# Altium PCB DistribValveBrd.PcbDoc
Units mm, origin at the board's own origin, x right, y up, seen from the top; angles counter-clockwise.
Board outline 60 x 32 mm, 2 copper layers (Top Layer, Bottom Layer); 13 components, 7 nets, 28 pads, 0 vias.
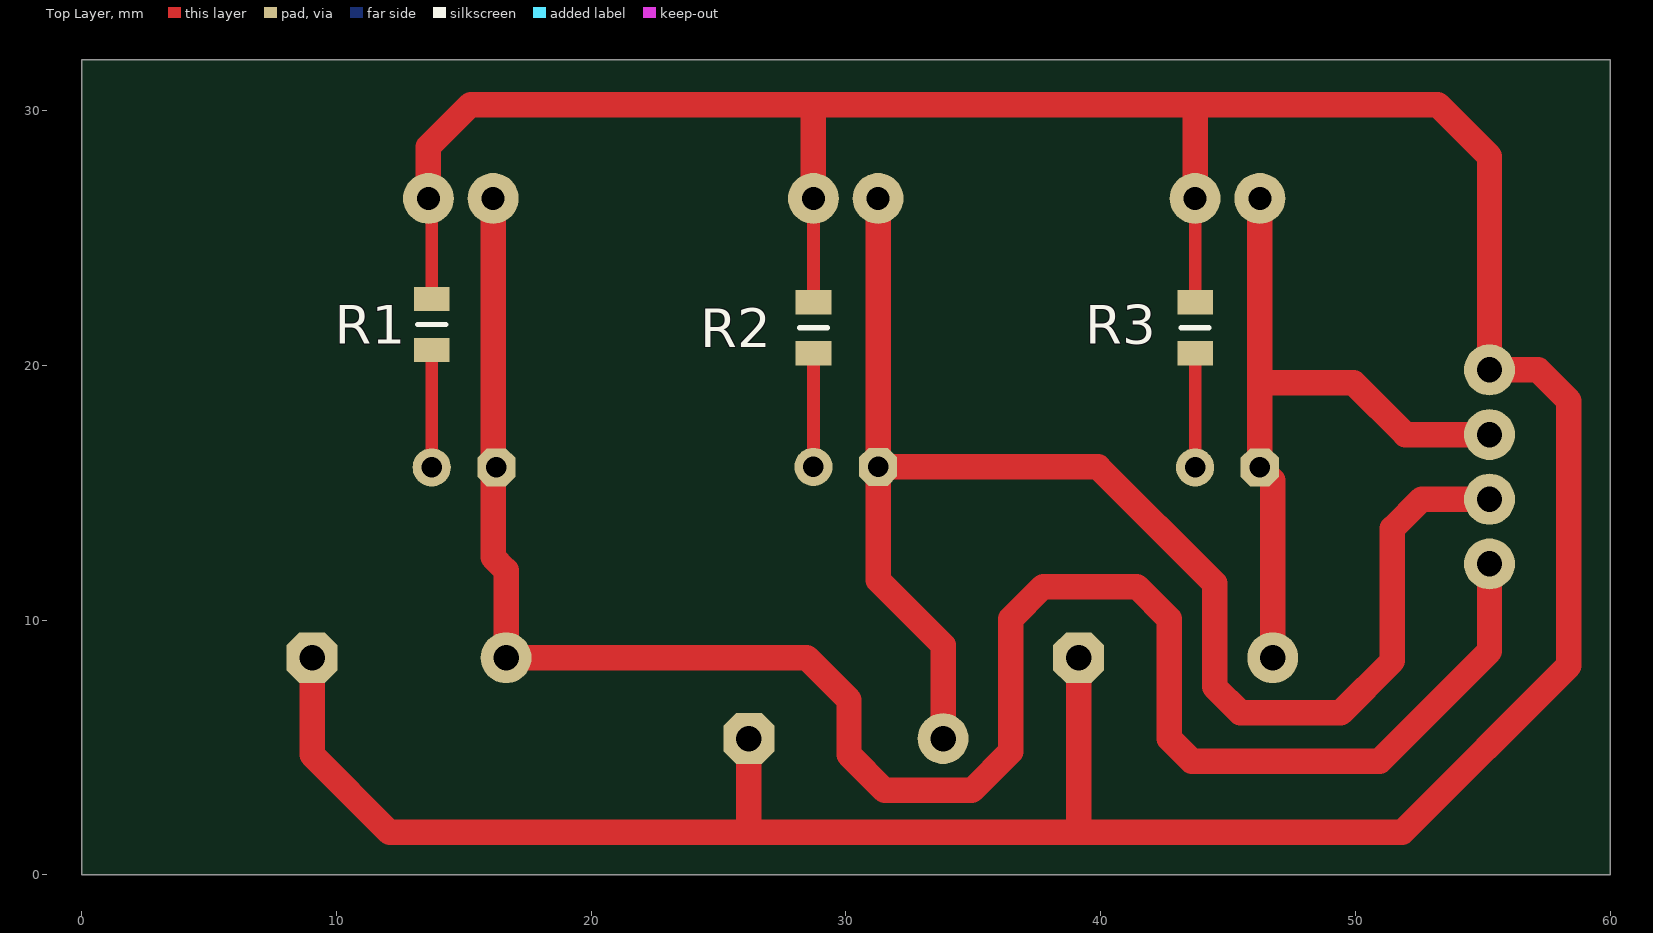
[diagram p0: Top Layer view]
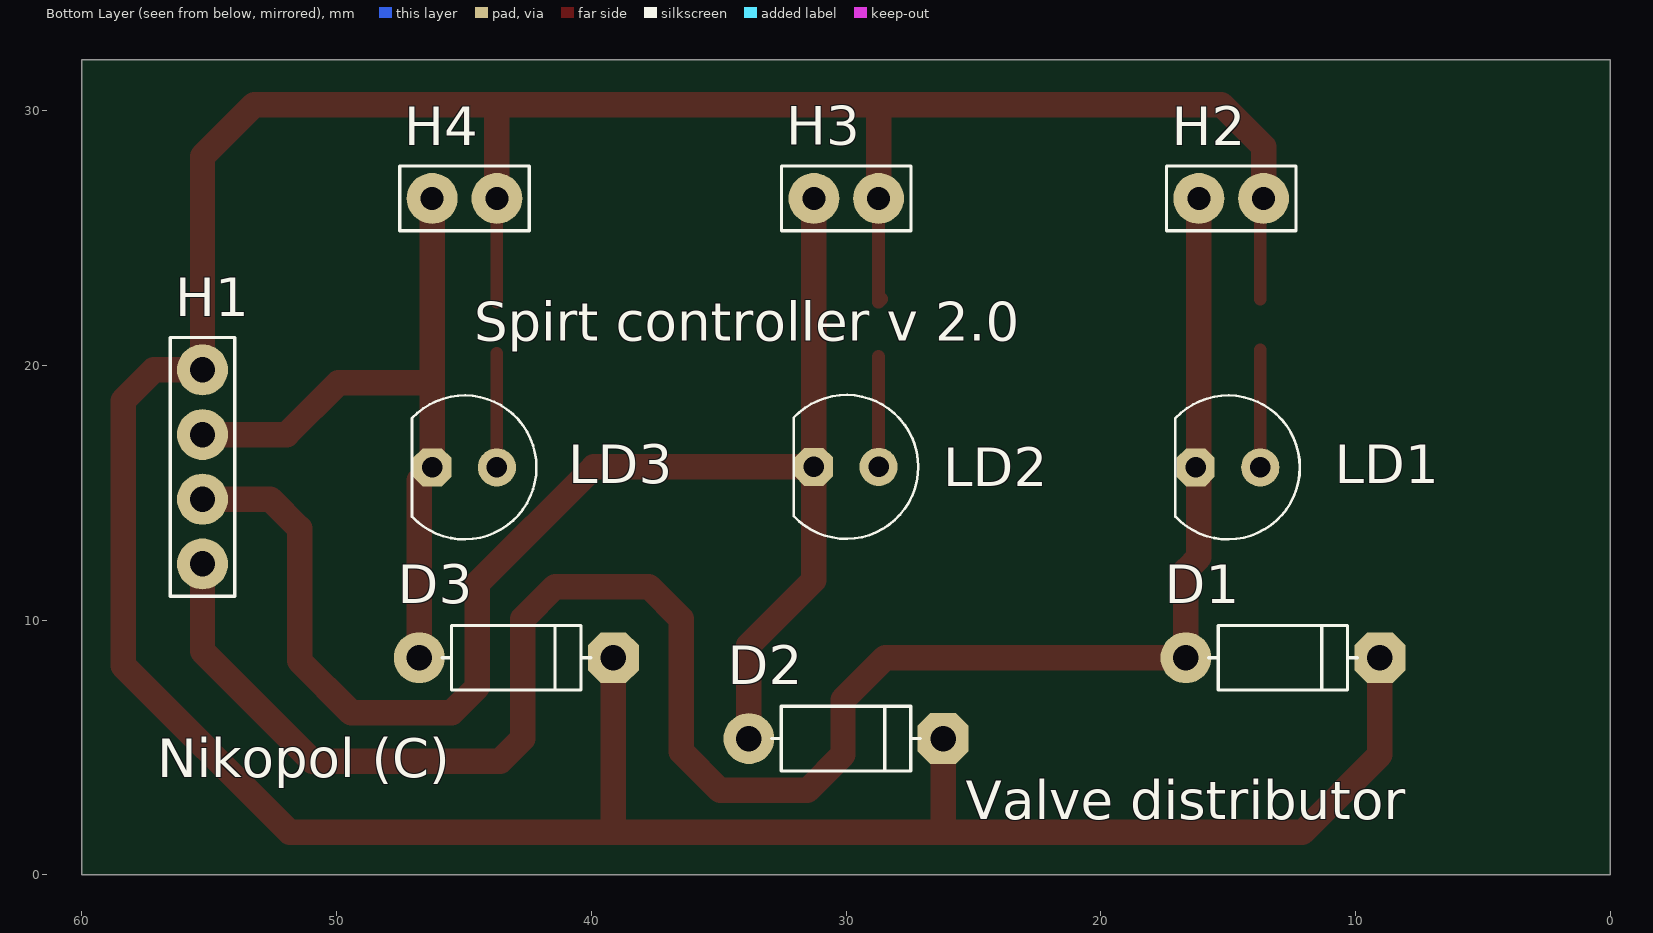
[diagram p1: Bottom Layer view, seen from below]
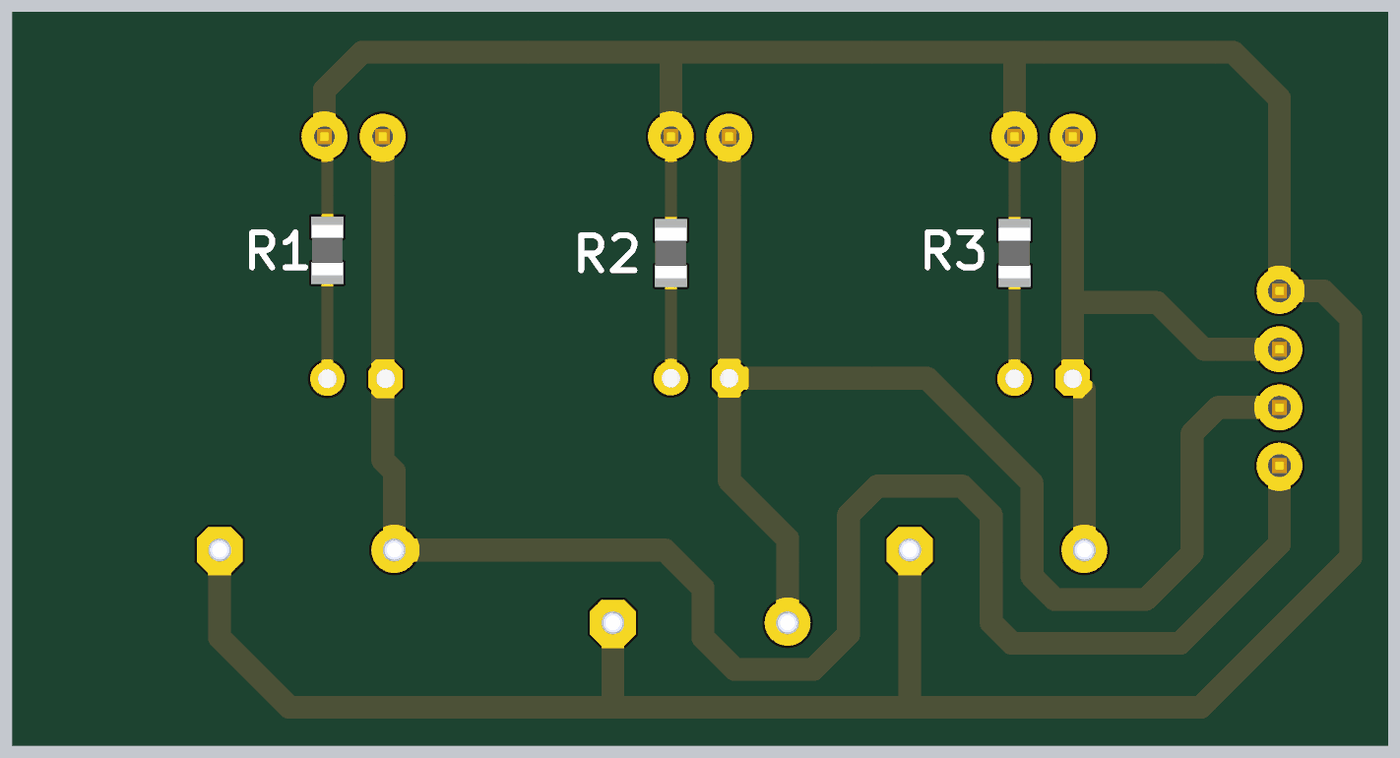
[diagram p2: 3D render of the assembled board from above, using the file's embedded part models]
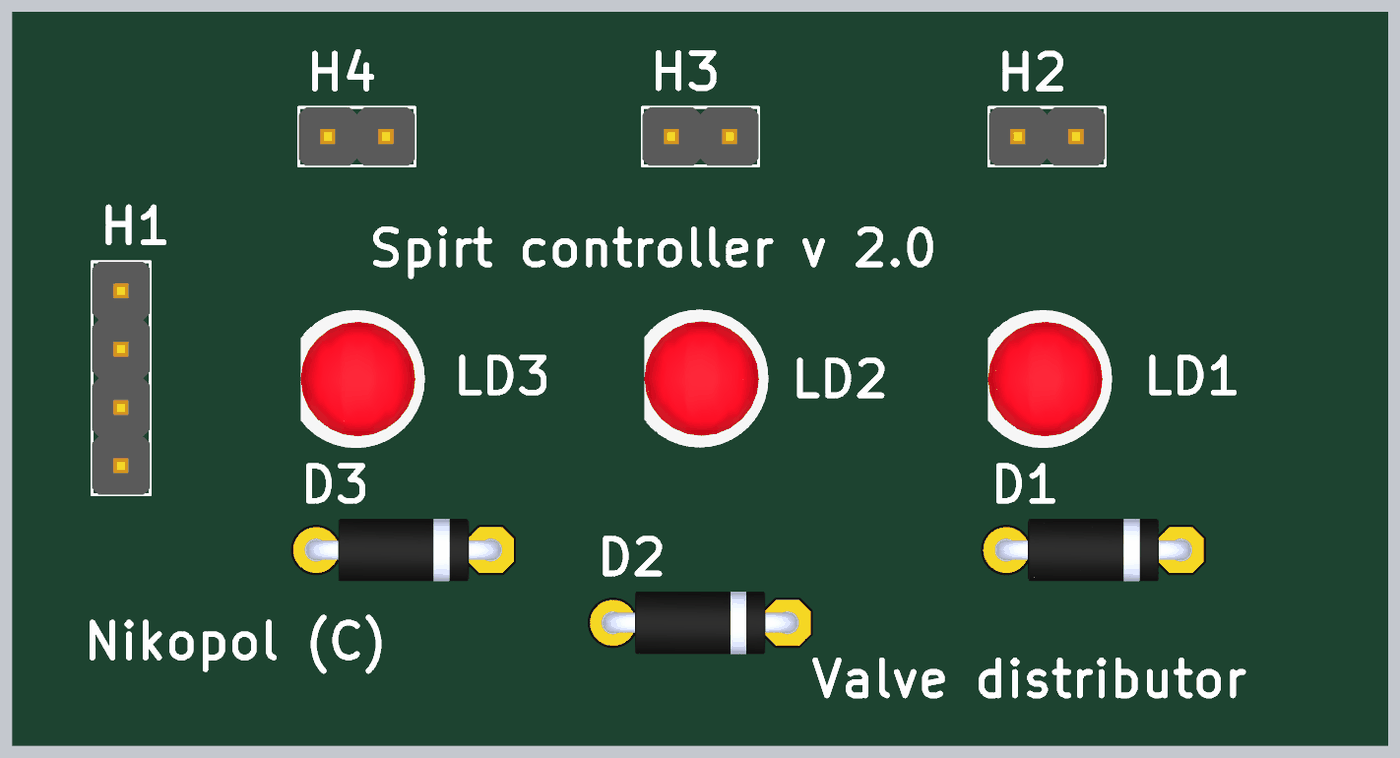
[diagram p3: 3D render of the assembled board from below, using the file's embedded part models]

## Layer stack, top to bottom
Top Solder: solder mask 0.0102, Solder Resist, Dk 3.5
Top Layer: signal copper 0.0356
Dielectric 1: dielectric 0.32, FR-4, Dk 4.8
Bottom Layer: signal copper 0.0356
Bottom Solder: solder mask 0.0102, Solder Resist, Dk 3.5

## Board outline
0,0 60,0 60,32 0,32

## Design rules (kind name [scope] priority, off if disabled: settings)
Clearance [All] p1: gap=0.254
PolygonConnect [All] p1: connectstyle=Relief reliefconductorwidth=0.254 reliefentries=4 polygonreliefangle="90 Angle" airgapwidth=0.254
RoutingVias [All] p1: holewidth=0.711 width=1.27 viastyle="Through Hole" minholewidth=0.711 minwidth=1.27 maxholewidth=0.711 maxwidth=1.27
SilkToSolderMaskClearance [IsPad] p1: minsilkscreentomaskgap=0 clearancetoexposedcopper=TRUE
SolderMaskExpansion [All] p1: expansion=0.102
UnpouredPolygon [All] p1: allowunpoured=FALSE
Width [All] p1: maxlimit=5 minlimit=0.254 preferedwidth=0.5
28 further rules are at their usual default settings.

## Components (designator, comment, footprint, x,y, rotation, side; value= is the part's Value field where it differs from the comment)
D1 "1N4007" DO-41-300 12.846,8.528 r180 bottom
D2 "1N4007" DO-41-300 30,5.353 r180 bottom
D3 "1N4007" DO-41-300 42.945,8.528 r180 bottom
H1 "H-1x4" J1x4 55.264,16.021 r270 bottom
H2 "H-1x2" J1x2 14.878,26.562 r180 bottom
H3 "H-1x2" J1x2 29.991,26.562 r180 bottom
H4 "H-1x2" J1x2 44.977,26.562 r180 bottom
LD1 "Led" "Led d5mm" 15.005,16 r0 bottom
LD2 "Led" "Led d5mm" 29.991,16.021 r0 bottom
LD3 "Led" "Led d5mm" 44.977,16 r0 bottom
R1 "5k1" RESC2012X60N 13.735,21.609 r90 top
R2 "5k1" RESC2012X60N 28.721,21.482 r90 top
R3 "5k1" RESC2012X60N 43.707,21.482 r90 top

## Footprints (in the part's own frame and the unit in brackets; to place one, negate y for a bottom-side part, rotate by r counter-clockwise, add the part's x,y. Pads: shape width x height; smd on the part's side, far side on the other; paste and mask are expansions set on the pad)
DO-41-300 [mm]
  round 2 hole 1: 1(-3.81,0)
  oct 2x2 hole 1: 2(3.81,0)
  silkscreen extent -2.92,-1.27 2.92,1.27, body extent -4.24,-1.36 4.24,1.36, height 2.81
J1x2 [mm]
  round 2 hole 0.9: 1(-1.27,0) 2(1.27,0)
  silkscreen extent -2.54,-1.27 2.54,1.27, body extent -2.54,-1.27 2.54,1.27, height 10.1
J1x4 [mm]
  round 2 hole 1: 1(-3.81,0) 2(-1.27,0) 3(1.27,0) 4(3.81,0)
  silkscreen extent -5.08,-1.27 5.08,1.27, body extent -5.08,-1.27 5.08,1.27, height 10.1
"Led d5mm" [mm]
  round 1.5 hole 0.8: 1(-1.27,0)
  oct 1.5x1.5 hole 0.8: 2(1.27,0)
  silkscreen extent -2.83,-2.82 2.06,2.82, body extent -2.97,-3 2.45,3.02, height 12.31
RESC2012X60N [mm] "Chip Resistor, EIA 0805, Metric 2012, Body 2.0x1.2mm, IPC Medium Density"
  rect 0.95x1.4 smd: 1(-1,0) 2(1,0)
  silkscreen extent 0,-0.55 0,0.55, body extent -1.1,-0.67 1.1,0.68, height 0.6

## Part data
D1 D2 D3: "1000V 1A"
LD1 LD2 LD3: library part Led-5mm, "5mm"
R1 R2 R3: library part R0805_5K1_1%_0.125W_100PPM, "Resistor - 1%"

## Nets (pads, with @x,y where several pads share a name; then routed paths per layer and width w, separated by ;. In a path a pad name is that pad's centre, name@x,y a point inside that pad or via, vN(x,y) a via of type N, cw(c..) or ccw(c..) an arc to the next point about the centre after c; other vN are vias at no path point)
NetD1_1: D1.1 H1.4 H2.1 LD1.2 | length 77.4
  Top Layer w1: H2.1 16.148,12.465 16.656,11.957 D1.1 28.467,8.528 30.118,6.877 30.118,4.718 31.515,3.321 34.944,3.321 36.468,4.845 36.468,10.052 37.738,11.322 41.421,11.322 42.691,10.052 42.691,5.353 43.58,4.464 50.946,4.464 55.264,8.782 H1.4
NetD1_2: D1.2 D2.2 D3.2 H1.1 H2.2 H3.2 H4.2 R1.2 R2.2 R3.2 | length 153.7
  Top Layer w0.5: R1.2 H2.2@13.735,26.435 ; R2.2@28.594,22.609 R2.2 H3.2 ; R3.2 H4.2
  Top Layer w1: D1.2 9.036,4.718 12.084,1.67 51.835,1.67 58.376,8.211 58.376,18.625 57.169,19.831 H1.1 55.264,28.213 53.232,30.245 43.707,30.245 ; H2.2 13.608,28.594 15.259,30.245 43.707,30.245 ; 26.19,2.187 D2.2 ; H3.2 28.721,30.118 ; 39.135,2.178 D3.2 ; H4.2 43.707,30.245
NetD2_1: D2.1 H1.3 H3.1 LD2.2 | length 59.2
  Top Layer w1: H3.1 LD2.2 ; D2.1 33.81,9.027 31.261,11.576 LD2.2 ; H1.3 52.597,14.751 51.454,13.608 51.454,8.401 49.422,6.369 45.485,6.369 44.469,7.385 44.469,11.449 39.897,16.021 LD2.2
NetD3_1: D3.1 H1.2 H4.1 LD3.2 | length 28.1
  Top Layer w1: H4.1 46.247,19.323 ; D3.1 46.755,15.492 LD3.2 46.247,19.323 ; H1.2 51.962,17.291 49.93,19.323 46.247,19.323
NetLD1_1: LD1.1 R1.1 | length 4.6
  Top Layer w0.5: LD1.1 R1.1
NetLD2_1: LD2.1 R2.1 | length 4.3
  Top Layer w0.5: LD2.1 R2.1@28.721,20.355
NetLD3_1: LD3.1 R3.1 | length 4.5
  Top Layer w0.5: LD3.1 R3.1

## Silkscreen, mask and mechanical layers (free items; w line width, h text height)
Bottom Overlay:
  text "Spirt controller v 2.0" at 44.596,20.974 h1.52
  text "Nikopol (C)" at 57.042,3.829 h1.52
  text "Valve distributor" at 25.292,2.178 h1.52
Mechanical 1:
  the board outline again, w0.254